# Altium PCB VIrtex_XC7vx690t_2ffg1927i_T_B.PcbDoc (part 2 of 5)
Units mm, origin at the board's own origin, x right, y up, seen from the top; angles counter-clockwise.
Board outline 230 x 148 mm, 12 copper layers (Top Layer 1, GND_IN_Layer, 1_V_IN_layer, 1.2_V_IN_layer, 1.8_V_IN_layer, 3.3_V_IN_layer, IN_Layer 6, IN_Layer 7, IN_Layer 8, IN_Layer 9, IN_Layer 10, Bottom Layer), stack 1.452 mm thick; 73 components, 655 nets, 2765 pads, 42 vias.
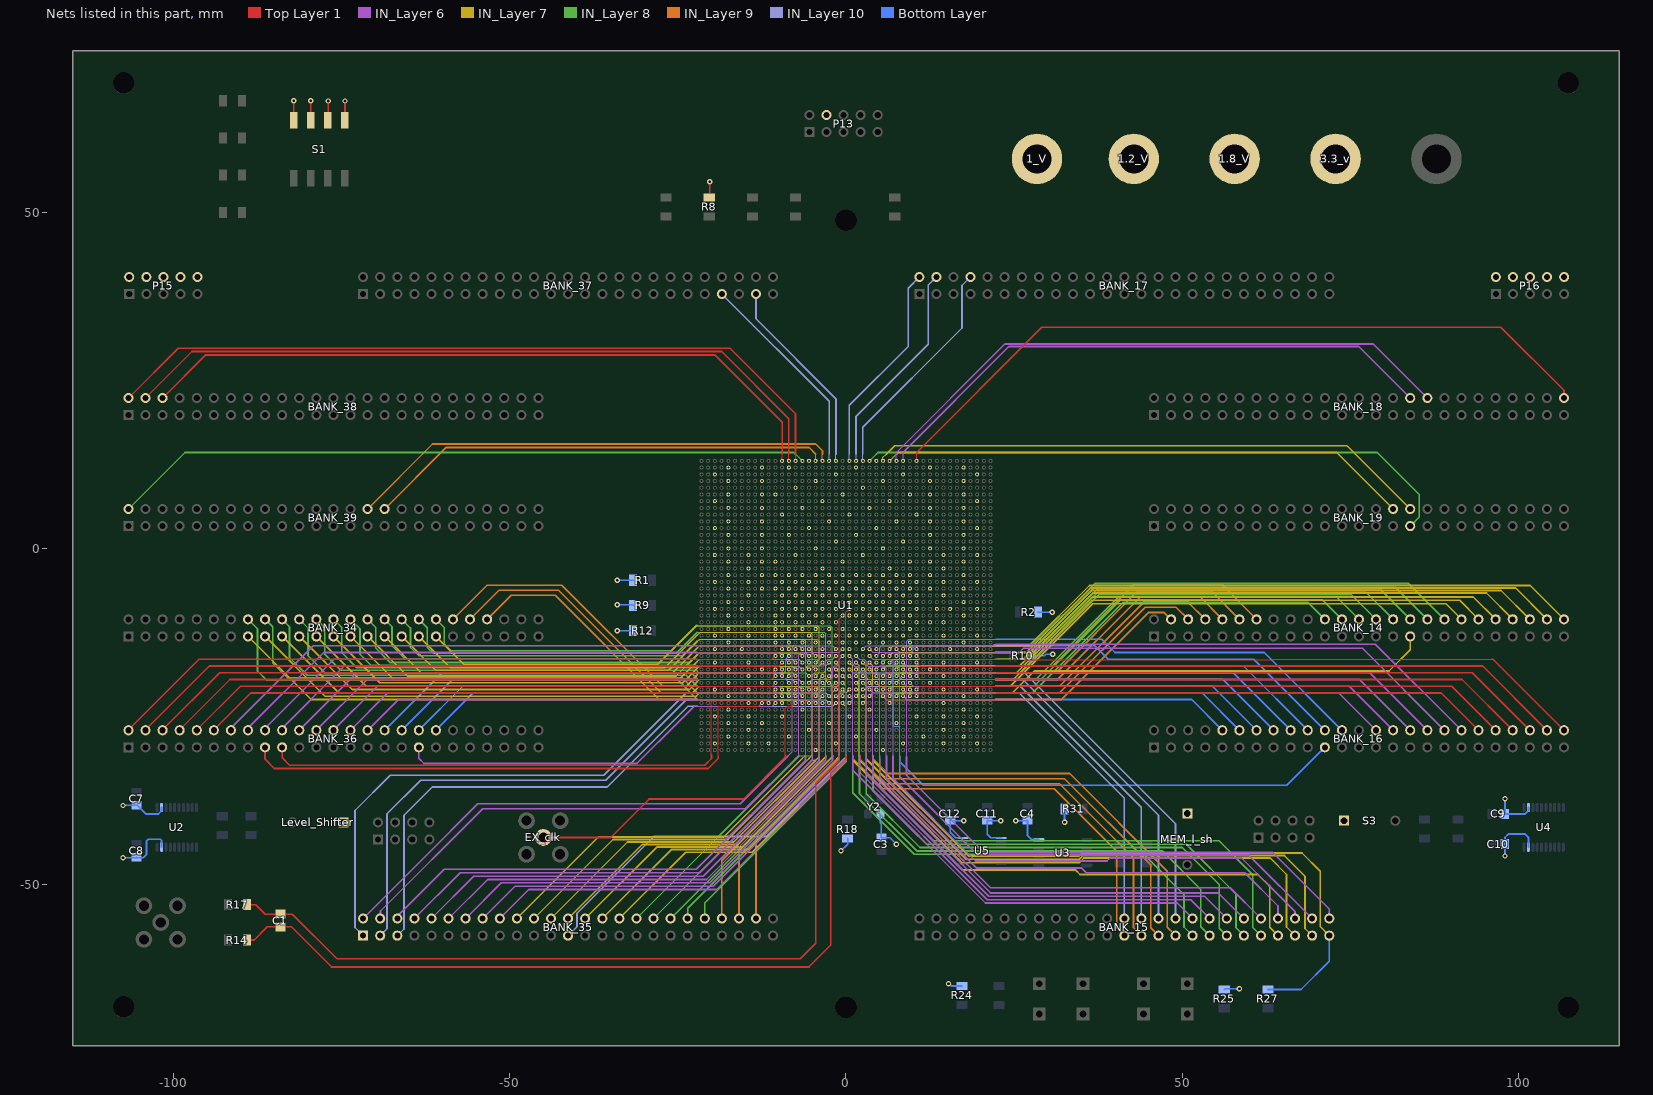
[diagram p12: the nets of this part, all layers, seen from the top]

## Part data
ADC_in EX_clk: "SMB Straight Connector", LatestRevisionDate=17-Jul-2002, LatestRevisionNote="Re-released for DXP Platform.", Publisher="Altium Limited"
BANK_14 BANK_15 BANK_16 BANK_17 BANK_18 BANK_19 BANK_34 BANK_35 BANK_36 BANK_37 BANK_38 BANK_39: "Header, 25-Pin, Dual row", LatestRevisionDate=17-Jul-2002, LatestRevisionNote="Re-released for DXP Platform.", Publisher="Altium Limited"
C1 C3 C4 C7 C8 C9 C10 C11 C12: "Ceramic Chip Capacitor - Standard", PackageDocument=Mar-2001, Code_IPC=2012[0805], Code_JEITA=0805, ComponentLink1Description="Manufacturer Link", ComponentLink1URL=http://www.kemet.com/, ComponentLink2Description=Datasheet, ComponentLink2URL=http://www.kemet.com/kemet/web/homepage/kechome.nsf/vapubfilesname/F3102TA.pdf/$file/F3102TA.pdf, DatasheetDocument=Mar-2001, LatestRevisionDate=19-Mar-2004, LatestRevisionNote="Silkscreen size reduced.", Note="Footprint corresponds to dimensions for bulk cassette packaging. This case size has tightened tolerances.", PackageReference=0805, Published=17-Jul-2002, Publisher="Altium Limited"
Level_Shifter MEM_l_sh S3: "DS1040-01RN, DIP переключатель 1pin  Номенклатурный номер   9000190948", LatestRevisionDate=17-Jul-2002, LatestRevisionNote="Re-released for DXP Platform.", PackageReference=DIP-4, Published=24-Mar-1999, Publisher="Altium Limited"
P13: library part JTAG_CONN_10_5X2, "Header, 5-Pin, Dual row", LatestRevisionDate=17-Jul-2002, LatestRevisionNote="Re-released for DXP Platform.", Publisher="Altium Limited"
P15 P16: "Header, 5-Pin, Dual row", LatestRevisionDate=17-Jul-2002, LatestRevisionNote="Re-released for DXP Platform.", Publisher="Altium Limited"
P17 P18: "Header, 4-Pin, Dual row", LatestRevisionDate=17-Jul-2002, LatestRevisionNote="Re-released for DXP Platform.", Publisher="Altium Limited"
R1 R2 R3 R4 R5 R6 R7 R8 R9 R10 R11 R12 R13 R14 R15 R16 R17 R18 R24 R25 R26 R27 R28 R29 R30 R31 R32 R33: "Resistor", LatestRevisionDate=17-Jul-2002, LatestRevisionNote="Re-released for DXP Platform.", PackageDescription="Axial Device, Thru-Hole; 2 Leads; 0.4 in Pin Spacing", PackageReference=AXIAL-0.4, Published=8-Jun-2000, Publisher="Altium Limited"
S1: "DIP Switch, 4 Position, SPST", Code_IPC=SOIC127P600-8, Code_JEDEC=MS-012-AA, LatestRevisionDate=29-May-2009, LatestRevisionNote="IPC-7351 Footprint Added.", PackageDescription="8-Pin Small Outline Integrated Circuit 1.27 mm Pitch", PackageReference=SO8, PackageVersion=Dec-2002, Published=24-Mar-1999, Publisher="Altium Limited"
SW1 SW2: library part "SWITCH TACTILE", "KLS7-TS6601-4.3-180, Кнопка тактовая h=4.3мм"
U1: "Virtex-7 FPGA, 1000 User I/Os, 1924-Ball BGA, Speed Grade 2, Industrial Grade, Pb-Free", Generic Part Number=XC7VX690T, Manufacturer=Xilinx, Code_JEDEC=MS-034-AAW-1, ComponentLink1Description=Datasheet, ComponentLink1URL=http://www.xilinx.com/support/documentation/data_sheets/ds180_7Series_Overview.pdf, ComponentLink2Description="Package Specification", ComponentLink2URL=http://www.xilinx.com/support/documentation/user_guides/ug475_7Series_Pkg_Pinout.pdf, DatasheetVersion=v1.12, GTX=0, Mounting Technology="Surface Mount", PackageDescription="Flip-Chip BGA, Body 45 x 45 mm, 1.0 mm Pitch", PackageReference=FFG1927, PackageVersion="Rev 1.8", PartNumber=XC7VX690T-2FFG1927I, RoHS=Pb-Free, SelectIO HP=600, Speed Grade=-2
U2 U4: "8-Bit Bidirectional Voltage-Level Shifter with Auto Direction Sensing  Чип и дип Номенклатурный номер / 9000157255 TXB0108PWR, Преобразователь логического уровня"
U3: Manufacturer=Micron, Package="SO8 Narrow", PartNumber=M25P20S-VMN6TPB, Voltage=2.3V-3.6V, Applications=Embedded, ComponentLink1Description="Manufacturer URL", ComponentLink1URL=http://www.micron.com/, ComponentLink2Description=Datasheet, ComponentLink2URL=http://www.micron.com/~/media/Documents/Products/Data%20Sheet/NOR%20Flash/Serial%20NOR/M25P/M25P20.pdf, ComponentLink3Description="Package Specification", ComponentLink3URL=http://www.micron.com/~/media/Documents/Products/Data%20Sheet/NOR%20Flash/Serial%20NOR/M25P/M25P05A.pdf, DatasheetVersion="Rev. 14", Density=2Mb, Mounting Technology="Surface Mount", PackageDescription="8-Pin SO Narrow, 3.9 X 4.9 mm, Pitch 1.27 mm", PackageReference=MICT-MN-8, PackageVersion="Rev 11", Part Family=M25P, Part Status=Production, RoHS=Yes, Speed="75 MHz", Type="Data Storage", Width=x1
U5: "Преобразователь логического уровня, VOLT-LEVEL TRANSLATOR, [TSSOP-14.] Номенклатурный номер / 9000183598"
Y2: library part "SIT8008AI-22- 18", "SIT8008AI-22- 18E-100.000000G"

## Free pads (board coordinates)
  round 3.2 hole 3.2 unplated mask-2539.97: 12(-107.4,-68.2) 12(-107.4,69.2) 12(0,-68.25) 12(0,48.75) 12(107.4,-68.25) 12(107.4,69.2)

## Via types
v1: diameter 0.8, hole 0.4, Top Layer 1 to Bottom Layer, 42 vias

## Nets (pads, with @x,y where several pads share a name; then routed paths per layer and width w, separated by ;. In a path a pad name is that pad's centre, name@x,y a point inside that pad or via, vN(x,y) a via of type N, cw(c..) or ccw(c..) an arc to the next point about the centre after c; other vN are vias at no path point)
1.2V: 1.2_V.1 R1.2 R2.2 U1.AB5 U1.AB40 U1.AC3 U1.AC10 U1.AC36 U1.AC42 U1.AD5 U1.AD23 U1.AD40 U1.AF5 U1.AF40 U1.AG3 U1.AG42 U1.AH5 U1.AH40 U1.AJ3 U1.AJ42 U1.AL3 U1.AL42 U1.AM5 U1.AM40 U1.AP5 U1.AP40 U1.AR3 U1.AR42 U1.AT5 U1.AT40 U1.AV5 U1.AV40 U1.AW3 U1.AW42 U1.AY5 U1.AY40 U1.B5 U1.B40 U1.BB5 U1.BB40 U1.BC3 U1.BC42 U1.C3 U1.C42 U1.D5 U1.D40 U1.F5 U1.F40 U1.G3 U1.G42 U1.H5 U1.H40 U1.K5 U1.K40 U1.L3 U1.L42 U1.M5 U1.M40 U1.P5 U1.P40 U1.R3 U1.R42 U1.T5 U1.T40 U1.V5 U1.V40 U1.W3 U1.W42 U1.Y5 U1.Y40 | length 4.5
  Bottom Layer w0.254: v1(-34,-4.756) -31.656,-4.756 R1.2@-31.65,-4.75 ; R2.2@28.55,-9.5 v1(30.65,-9.5)
1.8V: 1.8_V.1 C3.2 C7.2 C9.2 C12.2 Level_Shifter.1 MEM_l_sh.1 P13.4 P15.6 P15.8 P15.10 P16.6 P16.8 P16.10 R8.1 R9.2 R10.2 R12.2 R18.1 R24.2 R25.2 S1.5 S1.6 S1.7 S1.8 S3.1 U1.A17 U1.A27 U1.AA19 U1.AA27 U1.AB18 U1.AB23 U1.AB26 U1.AC19 U1.AC27 U1.AD18 U1.AD26 U1.AE12 U1.AE19 U1.AE27 U1.AE35 U1.AF18 U1.AF26 U1.AG12 U1.AG19 U1.AG27 U1.AH18 U1.AH26 U1.AJ13 U1.AJ19 U1.AJ23 U1.AJ27 U1.AK20 U1.AK30 U1.AL17 U1.AL27 U1.AM10 U1.AM14 U1.AM24 U1.AM35 U1.AN21 U1.AN31 U1.AP18 U1.AP28 U1.AR15 U1.AR25 U1.AT12 U1.AT22 U1.AT32 U1.AU19 U1.AU29 U1.AV16 U1.AV26 U1.AW13 U1.AW23 U1.AW33 U1.AY10 U1.AY20 U1.AY30 U1.B14 U1.B24 U1.BA17 U1.BA27 U1.BB14 U1.BB24 U1.BB34 U1.BC11 U1.BC21 U1.BC31 U1.BD18 U1.BD28 U1.C21 U1.C31 U1.D18 U1.D28 U1.E15 U1.E25 U1.F12 U1.F22 U1.F32 U1.G19 U1.G29 U1.H16 U1.H26 U1.J13 U1.J23 U1.J33 U1.K20 U1.K30 U1.L17 U1.L27 U1.M14 U1.M24 U1.N21 U1.N31 U1.P10 U1.P18 U1.P28 U1.P35 U1.R15 U1.R25 U1.T10 U1.T12 U1.T22 U1.T32 U1.T35 U1.U19 U1.U29 U1.V10 U1.V16 U1.V18 U1.V26 U1.V35 U1.W19 U1.W27 U1.Y18 U1.Y26 U2.VCCA U4.VCCA U5.VCCB Y2.4 | length 54.3
  Top Layer 1 w0.254: S1.8@-82.1,63.65 v1(-82.1,66.55) ; S1.7@-79.6,63.65 v1(-79.6,66.55) ; S1.6@-77.04,63.65 -77,63.69 v1(-77,66.5) ; S1.5@-74.5,63.65 v1(-74.5,66.5) ; R8.1@-20.333,52.15 -20.25,52.233 v1(-20.25,54.5)
  Bottom Layer w0.254: v1(-107.5,-38.25) -107.45,-38.2 -105.4,-38.2 -104.1,-39.5 -102.232,-39.5 -101.775,-39.043 U2.VCCA@-101.775,-38.55 ; v1(-34,-12.25) R12.2@-31.65,-12.25 ; v1@-33.966,-8.4 -31.716,-8.4 R9.2@-31.616,-8.5 ; v1(-0.75,-45) 0.25,-44 R18.1@0.25,-43.15 ; Y2.4@5.098,-39.5 5.098,-40.848 5.25,-41 C3.2@5.25,-43.05 ; C3.2@5.25,-43.05 6.55,-43.05 v1(7.5,-44) ; v1(15.25,-64.75) 15.398,-64.75 15.748,-65.1 R24.2@17.25,-65.1 ; U5.VCCB@17.4,-43.05 16.3,-43.05 15.5,-42.25 C12.2@15.5,-40.45 15.55,-40.5 v1(17.5,-40.5) ; R10.2@27.65,-16 29.5,-16 29.734,-15.766 30.734,-15.766 v1(30.75,-15.75) ; R25.2@56.25,-65.6 56.35,-65.5 v1(58.5,-65.5) ; v1(98,-37.25) 98,-39.45 C9.2@97.95,-39.5 101.018,-39.5 101.475,-39.043 U4.VCCA@101.475,-38.55
  other v1: -34,-8.4
1V: 1_V.1 U1.AA8 U1.AA13 U1.AA15 U1.AA17 U1.AA21 U1.AA23 U1.AA25 U1.AA29 U1.AA31 U1.AA33 U1.AA37 U1.AB12 U1.AB14 U1.AB16 U1.AB20 U1.AB24 U1.AB28 U1.AB30 U1.AB32 U1.AC7 U1.AC13 U1.AC15 U1.AC17 U1.AC21 U1.AC25 U1.AC29 U1.AC31 U1.AC33 U1.AC38 U1.AD12 U1.AD14 U1.AD16 U1.AD20 U1.AD24 U1.AD28 U1.AD30 U1.AD32 U1.AE8 U1.AE13 U1.AE15 U1.AE17 U1.AE21 U1.AE25 U1.AE29 U1.AE31 U1.AE33 U1.AE37 U1.AF12 U1.AF14 U1.AF16 U1.AF20 U1.AF22 U1.AF24 U1.AF28 U1.AF30 U1.AF32 U1.AG8 U1.AG13 U1.AG15 U1.AG17 U1.AG21 U1.AG23 U1.AG25 U1.AG29 U1.AG31 U1.AG33 U1.AG37 U1.AH12 U1.AH14 U1.AH16 U1.AH20 U1.AH22 U1.AH24 U1.AH28 U1.AH30 U1.AH32 U1.AJ7 U1.AJ15 U1.AJ17 U1.AJ33 U1.AJ38 U1.AL8 U1.AL37 U1.AN8 U1.AN37 U1.AP10 U1.AP35 U1.AR8 U1.AR37 U1.AU8 U1.AU37 U1.AW8 U1.AW37 U1.B10 U1.B35 U1.BA8 U1.BA37 U1.BC8 U1.BC37 U1.D10 U1.D35 U1.F10 U1.F35 U1.H10 U1.H35 U1.K10 U1.K35 U1.M10 U1.M35 U1.R8 U1.R37 U1.U8 U1.U37 U1.V12 U1.V14 U1.V20 U1.V22 U1.V24 U1.V28 U1.V30 U1.V32 U1.W8 U1.W13 U1.W15 U1.W17 U1.W21 U1.W23 U1.W25 U1.W29 U1.W31 U1.W33 U1.W37 U1.Y10 U1.Y12 U1.Y14 U1.Y16 U1.Y20 U1.Y22 U1.Y24 U1.Y28 U1.Y30 U1.Y32 U1.Y35
3.3V: 3.3_v.1 C4.2 C8.2 C10.2 C11.2 P15.2 P15.4 P16.2 P16.4 R31.2 U2.VCCB U3.8 U4.VCCB U5.VCCA | length 31.9
  Bottom Layer w0.254: v1(-107.5,-46) -105.55,-46 C8.2@-105.5,-45.95 -105.45,-46 -104.5,-46 -104,-45.5 -104,-43.5 -103.75,-43.25 -101.924,-43.25 -101.775,-43.399 U2.VCCB@-101.775,-44.45 ; v1(23,-40.5) 21.05,-40.5 C11.2@21,-40.45 21,-42.5 21.55,-43.05 U5.VCCA@23.1,-43.05 23.227,-43.05 U5.VCCA@23.25,-43.027 ; v1(25.25,-40.5) 26.95,-40.5 C4.2@27,-40.45 27,-42.75 27.529,-43.279 28.609,-43.279 U3.8@28.675,-43.345 ; v1(32.5,-40.75) R31.2@32.5,-38.75 ; v1(98,-45.75) 98,-44.05 C10.2@97.95,-44 97.982,-43.968 97.982,-43.018 98.5,-42.5 101,-42.5 101.475,-42.975 U4.VCCB@101.475,-44.45
A13: BANK_38.6 U1.A13 | length 104.7
  Top Layer 1 w0.14: U1.A13@-9.5,13 -9.5,14
  Top Layer 1 w0.254: BANK_38.6@-101.62,22.34 -95.21,28.75 -19.5,28.75 -9.5,18.75 -9.5,14
A14: BANK_38.4 U1.A14 | length 108.9
  Top Layer 1 w0.14: U1.A14@-8.5,13 -8.5,14
  Top Layer 1 w0.254: BANK_38.4@-104.16,22.34 -97.25,29.25 -18.5,29.25 -8.5,19.25 -8.5,14
A15: BANK_38.2 U1.A15 | length 113.3
  Top Layer 1 w0.14: U1.A15@-7.5,13 -7.5,14
  Top Layer 1 w0.254: BANK_38.2@-106.7,22.34 -99.29,29.75 -17.25,29.75 -7.5,20 -7.5,14
A16: BANK_39.2 U1.A16 | length 104.2
  IN_Layer 8 w0.14: -7.5,14 U1.A16@-6.5,13
  IN_Layer 8 w0.254: BANK_39.2@-106.7,5.84 -98.29,14.25 -7.75,14.25 -7.5,14
A18: BANK_39.32 U1.A18 | length 69.3
  IN_Layer 9 w0.14: U1.A18@-4.5,13 -4.5,14
  IN_Layer 9 w0.254: BANK_39.32@-68.6,5.84 -59.44,15 -5.5,15 -4.5,14
A19: BANK_39.30 U1.A19 | length 73.6
  IN_Layer 9 w0.14: U1.A19@-3.5,13 -3.5,14
  IN_Layer 9 w0.254: BANK_39.30@-71.14,5.84 -61.48,15.5 -4.5,15.5 -3.5,14.5 -3.5,14
A20: BANK_37.43 U1.A20 | length 31.4
  IN_Layer 10 w0.14: U1.A20@-2.5,13 -2.5,14
  IN_Layer 10 w0.254: BANK_37.43@-18.46,37.8 -2.5,21.84 -2.5,14
A21: BANK_37.47 U1.A21 | length 29.7
  IN_Layer 10 w0.14: U1.A21@-1.5,13 -1.5,14
  IN_Layer 10 w0.254: BANK_37.47@-13.38,37.8 -13.38,34.13 -1.5,22.25 -1.5,14
A23: BANK_17.2 U1.A23 | length 31.6
  IN_Layer 10 w0.14: U1.A23@0.5,13 0.5,14
  IN_Layer 10 w0.254: 0.5,14 0.5,21.25 9.25,30 9.25,38.69 BANK_17.2@10.9,40.34
A24: BANK_17.4 U1.A24 | length 32.3
  IN_Layer 10 w0.14: U1.A24@1.5,13 1.5,14
  IN_Layer 10 w0.254: 1.5,14 1.5,19.611 12.25,30.361 12.25,39.15 BANK_17.4@13.44,40.34
A25: BANK_17.8 U1.A25 | length 34
  IN_Layer 10 w0.14: U1.A25@2.5,13 2.5,14
  IN_Layer 10 w0.254: 2.5,14 2.5,18 17.25,32.75 17.25,39.07 BANK_17.8@18.52,40.34
A26: BANK_19.31 U1.A26 | length 90.1
  IN_Layer 8 w0.14: U1.A26@3.5,13 4.5,14
  IN_Layer 8 w0.254: 4.5,14 4.75,14.25 79,14.25 85.25,8 85.25,4.65 BANK_19.31@83.9,3.3
A28: BANK_19.32 U1.A28 | length 83.5
  IN_Layer 7 w0.14: U1.A28@5.5,13 5.5,13.5 6,14
  IN_Layer 7 w0.254: 6,14 7.25,15.25 8.25,15.25 74.49,15.25 BANK_19.32@83.9,5.84
A29: BANK_19.30 U1.A29 | length 78.9
  IN_Layer 7 w0.14: U1.A29@6.5,13 7.5,14
  IN_Layer 7 w0.254: 7.5,14 7.75,14.25 72.95,14.25 BANK_19.30@81.36,5.84
A30: BANK_18.34 U1.A30 | length 90.2
  IN_Layer 6 w0.14: U1.A30@7.5,13 7.5,14
  IN_Layer 6 w0.254: 7.5,14 7.5,14.25 23.626,30.376 78.404,30.376 BANK_18.34@86.44,22.34
A31: BANK_18.32 U1.A31 | length 86.4
  IN_Layer 6 w0.14: U1.A31@8.5,13 8.5,14
  IN_Layer 6 w0.254: 8.5,14 8.5,14.279 24.223,30.002 76.238,30.002 BANK_18.32@83.9,22.34
A33: BANK_18.50 U1.A33 | length 110.3
  Top Layer 1 w0.14: U1.A33@10.5,13 10.5,14
  Top Layer 1 w0.254: 10.5,14 10.5,14.25 29.121,32.871 97.379,32.871 106.76,23.49 BANK_18.50@106.76,22.34
ADC_N_in: C1.1 R17.1 U1.AD22 | length 139.3
  Top Layer 1 w0.14: -1.01,-30.9 -1.01,-10.535 -0.5,-10.025 U1.AD22@-0.5,-10
  Top Layer 1 w0.254: R17.1@-89.1,-53 -87.75,-53 -86.35,-54.4 C1.1@-84.1,-54.4 -82.35,-54.4 -75.694,-61.056 -6.806,-61.056 -4.5,-58.75 -4.5,-35 -1.01,-31.51 -1.01,-30.9
ADC_P_in: C1.2 R14.1 U1.AC23 | length 142.8
  Top Layer 1 w0.14: -0.01,-30.9 -0.01,-9.51 U1.AC23@0.5,-9
  Top Layer 1 w0.254: R14.1@-89.1,-58.975 R14.1@-89.1,-58.75 ; R14.1@-89.1,-58.25 -88,-58.25 -86.05,-56.3 C1.2@-84.1,-56.3 -82.45,-56.3 -76.5,-62.25 -5.5,-62.25 -2.25,-59 -2.25,-33.5 -0.01,-31.26 -0.01,-30.9
AJ14: BANK_36.14 U1.AJ14 | length 88.7
  IN_Layer 6 w0.14: -22.1,-14.5 -9,-14.5 U1.AJ14@-8.5,-15
  IN_Layer 6 w0.254: BANK_36.14@-91.77,-27.06 -79.21,-14.5 -22.1,-14.5
AJ16: BANK_34.31 U1.AJ16 | length 66.2
  IN_Layer 7 w0.14: -22.1,-14.826 -21.784,-14.51 -6.99,-14.51 U1.AJ16@-6.5,-15
  IN_Layer 7 w0.254: BANK_34.31@-68.6,-13.1 -63.2,-18.5 -25.774,-18.5 -22.1,-14.826
AJ21: BANK_35.2 U1.AJ21 | length 96.3
  IN_Layer 6 w0.14: -8.65,-30.9 -8.01,-30.26 -8.01,-14.817 -7.703,-14.51 -1.99,-14.51 U1.AJ21@-1.5,-15
  IN_Layer 6 w0.254: BANK_35.2@-71.8,-55.06 -62.868,-46.128 -54.74,-38 -15.75,-38 -8.65,-30.9
AJ22: BANK_35.4 U1.AJ22 | length 94.7
  IN_Layer 6 w0.14: -7.5,-31.25 -7.01,-30.76 -7.01,-15.817 -6.683,-15.49 -0.99,-15.49 U1.AJ22@-0.5,-15
  IN_Layer 6 w0.254: BANK_35.4@-69.26,-55.06 -69.218,-55.018 -69.218,-53.929 -54.039,-38.75 -15,-38.75 -7.5,-31.25
AJ25: BANK_15.50 U1.AJ25 | length 98.3
  IN_Layer 6 w0.14: U1.AJ25@2.5,-15 2.99,-14.51 8.703,-14.51 9,-14.807 9,-31
  IN_Layer 6 w0.254: 9,-31 9,-33.75 20.497,-45.247 63.467,-45.247 71.86,-53.64 BANK_15.50@71.86,-55.06
AJ26: BANK_15.48 U1.AJ26 | length 93.1
  IN_Layer 6 w0.14: U1.AJ26@3.5,-15 3.99,-15.49 7.683,-15.49 8,-15.807 8,-31
  IN_Layer 6 w0.254: 8,-31 8,-34 19.621,-45.621 59.881,-45.621 BANK_15.48@69.32,-55.06
AJ29: BANK_14.50 U1.AJ29 | length 106.3
  IN_Layer 7 w0.14: U1.AJ29@6.5,-15 7.01,-14.49 22.3,-14.49
  IN_Layer 7 w0.254: 22.3,-14.49 27.26,-14.49 36.215,-5.535 101.735,-5.535 BANK_14.50@106.76,-10.56
AJ30: BANK_16.16 U1.AJ30 | length 63.2
  Bottom Layer w0.14: U1.AJ30@7.5,-15 7.99,-15.49 7.99,-19.183 8.297,-19.49 22.3,-19.49
  Bottom Layer w0.254: 22.3,-19.49 56.01,-19.49 BANK_16.16@63.58,-27.06
AJ31: BANK_16.24 U1.AJ31 | length 71.9
  Bottom Layer w0.14: U1.AJ31@8.5,-15 9,-14.5 9,-13.807 9.297,-13.51 22.3,-13.51
  Bottom Layer w0.254: 22.3,-13.51 38.01,-13.51 40,-15.5 62.18,-15.5 BANK_16.24@73.74,-27.06
AJ32: BANK_16.38 U1.AJ32 | length 87.6
  IN_Layer 6 w0.14: U1.AJ32@9.5,-15 9.99,-14.51 21.764,-14.51 22.024,-14.25 22.3,-14.25
  IN_Layer 6 w0.254: 22.3,-14.25 78.71,-14.25 BANK_16.38@91.52,-27.06
AK12: BANK_36.2 U1.AK12 | length 100.8
  Top Layer 1 w0.14: -22.3,-16.51 -11.01,-16.51 U1.AK12@-10.5,-16
  Top Layer 1 w0.254: BANK_36.2@-106.73,-27.03 -96.21,-16.51 -22.3,-16.51
AK13: BANK_36.16 U1.AK13 | length 84.7
  IN_Layer 6 w0.14: -22.1,-15.5 -10,-15.5 U1.AK13@-9.5,-16
  IN_Layer 6 w0.254: BANK_36.16@-89.23,-27.06 -77.67,-15.5 -22.1,-15.5
AK14: BANK_36.32 U1.AK14 | length 65.7
  Bottom Layer w0.14: -22.1,-18.49 -9.297,-18.49 -8.995,-18.188 -8.995,-16.495 U1.AK14@-8.5,-16
  Bottom Layer w0.254: BANK_36.32@-68.6,-27.06 -60.03,-18.49 -22.1,-18.49
AK16: BANK_34.29 U1.AK16 | length 68.7
  IN_Layer 7 w0.14: -22.1,-15.826 -21.784,-15.51 -6.99,-15.51 U1.AK16@-6.5,-16
  IN_Layer 7 w0.254: BANK_34.29@-71.14,-13.1 -65.24,-19 -25.274,-19 -22.1,-15.826
AK17: BANK_34.33 U1.AK17 | length 66.6
  IN_Layer 7 w0.14: -22.1,-13.85 -21.76,-13.51 -6.297,-13.51 -5.99,-13.817 -5.99,-15.51 U1.AK17@-5.5,-16
  IN_Layer 7 w0.254: BANK_34.33@-66.06,-13.1 -61.034,-18.126 -26.376,-18.126 -22.1,-13.85
AK18: BANK_34.35 U1.AK18 | length 66.1
  IN_Layer 7 w0.14: -22.1,-12.907 -21.703,-12.51 -5.297,-12.51 -4.99,-12.817 -4.99,-15.51 U1.AK18@-4.5,-16
  IN_Layer 7 w0.254: BANK_34.35@-63.52,-13.1 -58.87,-17.75 -26.943,-17.75 -22.1,-12.907
AK19: BANK_35.6 U1.AK19 | length 88.2
  IN_Layer 6 w0.14: -6.01,-30.9 -6.01,-16.817 -5.683,-16.49 -3.99,-16.49 U1.AK19@-3.5,-16
  IN_Layer 6 w0.254: BANK_35.6@-66.72,-55.06 -66.72,-54.723 -66.344,-54.347 -66.344,-54.344 -59.75,-47.75 -22.25,-47.75 -6.01,-31.51 -6.01,-30.9
AK21: BANK_35.8 U1.AK21 | length 87.1
  IN_Layer 6 w0.14: -5.01,-30.9 -5.01,-17.817 -4.683,-17.49 -3.297,-17.49 -2.99,-17.183 -2.99,-16.797 -2.683,-16.49 -1.99,-16.49 U1.AK21@-1.5,-16
  IN_Layer 6 w0.254: BANK_35.8@-64.18,-55.06 -57.37,-48.25 -21.75,-48.25 -5.01,-31.51 -5.01,-30.9
AK22: BANK_35.10 U1.AK22 | length 85.4
  IN_Layer 6 w0.14: -4,-31 -3.99,-30.99 -3.99,-30.9 -3.99,-19.797 -3.688,-19.495 -2.302,-19.495 -2,-19.193 -2,-17.807 -1.683,-17.49 -1.297,-17.49 -0.99,-17.183 -0.99,-16.49 U1.AK22@-0.5,-16
  IN_Layer 6 w0.254: BANK_35.10@-61.64,-55.06 -55.33,-48.75 -21.25,-48.75 -4,-31.5 -4,-31
AK23: BANK_15.42 U1.AK23 | length 86.9
  IN_Layer 6 w0.14: U1.AK23@0.5,-16 0.99,-16.49 0.99,-17.183 1.316,-17.509 1.702,-17.509 2.01,-17.817 2.01,-18.203 2.317,-18.51 4.703,-18.51 5.01,-18.817 5.01,-30.9
  IN_Layer 6 w0.254: 5.01,-30.9 5.01,-34.03 21.48,-50.5 57.14,-50.5 BANK_15.42@61.7,-55.06
AK24: BANK_15.44 U1.AK24 | length 89.8
  IN_Layer 6 w0.14: U1.AK24@1.5,-16 1.99,-16.49 2.683,-16.49 3.01,-16.817 3.01,-17.203 3.317,-17.51 5.703,-17.51 6.01,-17.817 6.01,-30.9
  IN_Layer 6 w0.254: 6.01,-30.9 6.01,-34.179 19.361,-47.531 34.999,-47.531 35.718,-48.25 59.289,-48.25 64.24,-53.201 BANK_15.44@64.24,-55.06
AK26: BANK_15.46 U1.AK26 | length 90.6
  IN_Layer 6 w0.14: U1.AK26@3.5,-16 3.99,-16.49 6.683,-16.49 7,-16.807 7,-30.9
  IN_Layer 6 w0.254: 7,-30.9 7,-34.25 19.25,-46.5 38.813,-46.5 39.25,-46.063 58.813,-46.063 66.78,-54.03 BANK_15.46@66.78,-55.06
AK27: BANK_14.36 U1.AK27 | length 91.7
  Top Layer 1 w0.14: U1.AK27@4.5,-16 U1.AK27@4.6,-16
  IN_Layer 8 w0.14: U1.AK27@4.5,-16 4.99,-15.51 4.99,-14.76 5.25,-14.5 22.3,-14.5
  IN_Layer 8 w0.254: 22.3,-14.5 27.721,-14.5 36.971,-5.25 83.67,-5.25 BANK_14.36@88.98,-10.56
AK28: BANK_14.34 U1.AK28 | length 87.1
  IN_Layer 8 w0.14: U1.AK28@5.5,-16 5.99,-15.51 22.3,-15.51
  IN_Layer 8 w0.254: 22.3,-15.51 27.24,-15.51 36.965,-5.785 81.665,-5.785 BANK_14.34@86.44,-10.56
AK29: BANK_14.48 U1.AK29 | length 103.8
  IN_Layer 7 w0.14: U1.AK29@6.5,-16 7.01,-15.49 22.3,-15.49
  IN_Layer 7 w0.254: 22.3,-15.49 26.789,-15.49 36.37,-5.909 99.569,-5.909 BANK_14.48@104.22,-10.56
AK31: BANK_16.22 U1.AK31 | length 68.7
  Bottom Layer w0.14: U1.AK31@8.5,-16 9.01,-15.49 9.703,-15.49 10,-15.193 10,-14.807 10.297,-14.51 22.3,-14.51
  Bottom Layer w0.254: 22.3,-14.51 37.01,-14.51 39,-16.5 60.64,-16.5 BANK_16.22@71.2,-27.06
AK32: BANK_16.36 U1.AK32 | length 85
  IN_Layer 6 w0.14: U1.AK32@9.5,-16 9.99,-15.51 22.3,-15.51
  IN_Layer 6 w0.254: 22.3,-15.51 25.762,-15.51 26.323,-14.948 26.398,-14.874 30.749,-14.868 cw(c30.75,-15.75) 30.75,-14.868 76.794,-14.874 76.868,-14.948 BANK_16.36@88.98,-27.06
AK33: BANK_16.50 U1.AK33 | length 100.8
  Top Layer 1 w0.14: U1.AK33@10.5,-16 11.01,-16.51 22.3,-16.51
  Top Layer 1 w0.254: 22.3,-16.51 22.51,-16.51 30.737,-16.632 ccw(c30.75,-15.75) 30.752,-16.632 96,-16.51 96.21,-16.51 96.284,-16.584 BANK_16.50@106.76,-27.06
AL13: BANK_36.4 U1.AL13 | length 98.8
  Top Layer 1 w0.14: -22.3,-17.51 -10.01,-17.51 U1.AL13@-9.5,-17
  Top Layer 1 w0.254: BANK_36.4@-104.19,-27.03 -94.67,-17.51 -22.3,-17.51
AL14: BANK_36.18 U1.AL14 | length 82.8
  IN_Layer 6 w0.14: -22.1,-16.5 -9,-16.5 U1.AL14@-8.5,-17
  IN_Layer 6 w0.254: BANK_36.18@-86.69,-27.06 -76.13,-16.5 -22.1,-16.5
AL15: BANK_34.27 U1.AL15 | length 70.3
  IN_Layer 7 w0.14: -22.1,-16.826 -21.784,-16.51 -7.99,-16.51 U1.AL15@-7.5,-17
  IN_Layer 7 w0.254: BANK_34.27@-73.68,-13.1 -67.28,-19.5 -24.774,-19.5 -22.1,-16.826
AL16: BANK_34.28 U1.AL16 | length 72.8
  IN_Layer 8 w0.14: -22.1,-16.826 -21.784,-16.51 -6.99,-16.51 U1.AL16@-6.5,-17
  IN_Layer 8 w0.254: BANK_34.28@-73.68,-10.56 -72.262,-11.978 -72.262,-14.174 -72.262,-15.738 -70.626,-17.374 -22.648,-17.374 -22.1,-16.826
AL18: BANK_34.37 U1.AL18 | length 66.6
  IN_Layer 7 w0.14: -22.1,-11.5 -4.307,-11.5 -3.99,-11.817 -3.99,-16.49 U1.AL18@-4.5,-17
  IN_Layer 7 w0.254: BANK_34.37@-60.98,-13.1 -56.83,-17.25 -28,-17.25 -22.25,-11.5 -22.1,-11.5
AL19: BANK_35.20 U1.AL19 | length 68.8
  IN_Layer 7 w0.14: -6.5,-31.25 -6.01,-30.76 -6.01,-17.817 -5.683,-17.49 -3.99,-17.49 U1.AL19@-3.5,-17
  IN_Layer 7 w0.254: BANK_35.20@-48.94,-55.06 -36.816,-42.936 -18.186,-42.936 -6.5,-31.25
AL20: BANK_35.22 U1.AL20 | length 67.1
  IN_Layer 7 w0.14: -5.5,-31.25 -5.01,-30.76 -5.01,-18.817 -4.683,-18.49 -3.297,-18.49 -2.99,-18.183 -2.99,-17.49 U1.AL20@-2.5,-17
  IN_Layer 7 w0.254: BANK_35.22@-46.4,-55.06 -34.65,-43.31 -17.56,-43.31 -5.5,-31.25
AL21: BANK_35.28 U1.AL21 | length 61.6
  IN_Layer 7 w0.14: -2.01,-30.9 -2.01,-20.817 -1.703,-20.51 -1.317,-20.51 -1.01,-20.203 -1.01,-17.49 U1.AL21@-1.5,-17
  IN_Layer 7 w0.254: BANK_35.28@-38.78,-55.06 -28.152,-44.432 -15.432,-44.432 -2.01,-31.01 -2.01,-30.9
AL23: BANK_15.43 U1.AL23 | length 92.3
  IN_Layer 7 w0.14: U1.AL23@0.5,-17 1,-17.5 1,-31.5
  IN_Layer 7 w0.254: 1,-31.5 17.353,-47.853 34.156,-47.853 34.803,-48.5 61.25,-48.5 63,-50.25 63,-56.36 BANK_15.43@64.24,-57.6
AL24: BANK_15.45 U1.AL24 | length 95.4
  IN_Layer 7 w0.14: U1.AL24@1.5,-17 2,-17.5 2,-31.5
  IN_Layer 7 w0.254: 2,-31.5 17.25,-46.75 34.702,-46.75 35.389,-46.063 63.063,-46.063 65.5,-48.5 65.5,-56.32 BANK_15.45@66.78,-57.6
AL25: BANK_15.47 U1.AL25 | length 96.8
  IN_Layer 7 w0.14: U1.AL25@2.5,-17 3,-17.5 3,-31.387
  IN_Layer 7 w0.254: 3,-31.387 17.863,-46.25 34.673,-46.25 35.234,-45.689 65.189,-45.689 68.25,-48.75 68.25,-56.53 BANK_15.47@69.32,-57.6
AL26: BANK_15.49 R27.2 U1.AL26 | length 113.2
  IN_Layer 7 w0.14: U1.AL26@3.5,-17 4,-17.5 4,-31.5
  IN_Layer 7 w0.254: 4,-31.5 18.25,-45.75 34.644,-45.75 35.079,-45.315 67.815,-45.315 70.5,-48 70.5,-56.24 BANK_15.49@71.86,-57.6
  Bottom Layer w0.254: R27.2@62.75,-65.6 67.65,-65.6 71.86,-61.39 BANK_15.49@71.86,-57.6
AL28: BANK_14.32 U1.AL28 | length 84.7
  IN_Layer 8 w0.14: U1.AL28@5.5,-17 5.99,-16.51 22.3,-16.51
  IN_Layer 8 w0.254: 22.3,-16.51 26.932,-16.51 37.283,-6.159 79.499,-6.159 BANK_14.32@83.9,-10.56
AL29: BANK_14.46 U1.AL29 | length 101.4
  IN_Layer 7 w0.14: U1.AL29@6.5,-17 7.01,-16.49 22.3,-16.49
  IN_Layer 7 w0.254: 22.3,-16.49 26.318,-16.49 36.524,-6.283 97.403,-6.283 BANK_14.46@101.68,-10.56
AL30: BANK_16.21 U1.AL30 | length 82.9
  Bottom Layer w0.14: U1.AL30@7.5,-17 7,-17.5 7,-26.408 7.082,-26.49 7.925,-26.49 8.008,-26.572 8.008,-30.9
  Bottom Layer w0.254: 8.008,-30.9 8.008,-31.758 11.5,-35.25 65.55,-35.25 BANK_16.21@71.2,-29.6
AL31: BANK_16.20 U1.AL31 | length 64.3
  Bottom Layer w0.14: U1.AL31@8.5,-17 9.01,-17.51 22.3,-17.51
  Bottom Layer w0.254: 22.3,-17.51 59.11,-17.51 BANK_16.20@68.66,-27.06
AL33: BANK_16.48 U1.AL33 | length 97.9
  Top Layer 1 w0.14: U1.AL33@10.5,-17 11.01,-17.51 22.3,-17.51
  Top Layer 1 w0.254: 22.3,-17.51 94.67,-17.51 BANK_16.48@104.22,-27.06
AM12: BANK_36.6 U1.AM12 | length 94.9
  Top Layer 1 w0.14: -22.3,-18.49 -10.99,-18.49 U1.AM12@-10.5,-18
  Top Layer 1 w0.254: BANK_36.6@-101.65,-27.03 -93.11,-18.49 -22.3,-18.49
AM13: BANK_36.20 U1.AM13 | length 78.8
  IN_Layer 6 w0.14: -22.1,-17.5 -10,-17.5 U1.AM13@-9.5,-18
  IN_Layer 6 w0.254: BANK_36.20@-84.15,-27.06 -74.59,-17.5 -22.1,-17.5
AM15: BANK_34.25 U1.AM15 | length 72.8
  IN_Layer 7 w0.14: -22.1,-17.826 -21.784,-17.51 -7.99,-17.51 U1.AM15@-7.5,-18
  IN_Layer 7 w0.254: BANK_34.25@-76.22,-13.1 -69.32,-20 -24.274,-20 -22.1,-17.826
AM16: BANK_34.26 U1.AM16 | length 75.2
  IN_Layer 8 w0.14: -22.1,-17.75 -22.024,-17.75 -21.784,-17.51 -6.99,-17.51 U1.AM16@-6.5,-18
  IN_Layer 8 w0.254: BANK_34.26@-76.22,-10.56 -75,-11.78 -75,-15.5 -72.75,-17.75 -22.1,-17.75
AM17: BANK_34.30 U1.AM17 | length 72.7
  IN_Layer 8 w0.14: -22.1,-15.826 -21.784,-15.51 -6.297,-15.51 -5.99,-15.817 -5.99,-17.51 U1.AM17@-5.5,-18
  IN_Layer 8 w0.254: BANK_34.30@-71.14,-10.56 -69.926,-11.774 -69.926,-14.824 -67.75,-17 -23.274,-17 -22.1,-15.826
AM18: BANK_34.32 U1.AM18 | length 72.1
  IN_Layer 8 w0.14: -22.1,-14.826 -21.784,-14.51 -5.297,-14.51 -4.99,-14.817 -4.99,-17.51 U1.AM18@-4.5,-18
  IN_Layer 8 w0.254: BANK_34.32@-68.6,-10.56 -67.5,-11.66 -67.5,-14.5 -65.5,-16.5 -23.774,-16.5 -22.1,-14.826
AM20: BANK_35.26 U1.AM20 | length 62.1
  IN_Layer 7 w0.14: -3.5,-31.5 -3.01,-31.01 -3.01,-19.817 -2.693,-19.5 -2.307,-19.5 -2.01,-19.203 -2.01,-18.49 U1.AM20@-2.5,-18
  IN_Layer 7 w0.254: BANK_35.26@-41.32,-55.06 -30.318,-44.058 -16.058,-44.058 -3.5,-31.5
AM21: BANK_35.16 U1.AM21 | length 76.5
  IN_Layer 6 w0.14: U1.AM21@-1.5,-18 -1,-18.5 -1,-30.9
  IN_Layer 6 w0.254: BANK_35.16@-54.02,-55.06 -49.21,-50.25 -19.75,-50.25 -1,-31.5 -1,-30.9
AM22: BANK_35.18 U1.AM22 | length 74.9
  IN_Layer 6 w0.14: U1.AM22@-0.5,-18 -0.01,-18.49 -0.01,-31.01
  IN_Layer 6 w0.254: BANK_35.18@-51.48,-55.06 -47.17,-50.75 -19.25,-50.75 -0.01,-31.51 -0.01,-31.01
AM23: BANK_15.34 U1.AM23 | length 74.9
  IN_Layer 6 w0.14: U1.AM23@0.5,-18 1.01,-18.51 1.01,-30.9
  IN_Layer 6 w0.254: 1.01,-30.9 1.01,-33.01 20.75,-52.75 49.23,-52.75 BANK_15.34@51.54,-55.06
AM25: BANK_15.39 U1.AM25 | length 85.9
  IN_Layer 8 w0.14: U1.AM25@2.5,-18 2.99,-18.49 2.99,-19.183 3.302,-19.495 3.688,-19.495 4,-19.807 4,-31.5
  IN_Layer 8 w0.254: 4,-31.5 4,-36 12,-44 50.591,-44 58,-51.409 58,-56.44 BANK_15.39@59.16,-57.6
AM26: BANK_15.41 U1.AM26 | length 89
  IN_Layer 8 w0.14: U1.AM26@3.5,-18 3.99,-18.49 4.683,-18.49 5,-18.807 5,-31.447
  IN_Layer 8 w0.254: 5,-31.447 5,-35.5 13,-43.5 55.47,-43.5 60.5,-48.53 60.5,-56.4 BANK_15.41@61.7,-57.6
AM27: BANK_14.14 U1.AM27 | length 63.8
  IN_Layer 9 w0.14: U1.AM27@4.5,-18 5.01,-17.49 22.3,-17.49
  IN_Layer 9 w0.254: 22.3,-17.49 30.76,-17.49 42.73,-5.52 56,-5.52 BANK_14.14@61.04,-10.56
AM28: BANK_14.30 U1.AM28 | length 82.3
  IN_Layer 8 w0.14: U1.AM28@5.5,-18 6,-17.5 22.3,-17.5
  IN_Layer 8 w0.254: 22.3,-17.5 26.471,-17.5 37.438,-6.533 77.333,-6.533 BANK_14.30@81.36,-10.56
AM30: BANK_14.44 U1.AM30 | length 98
  IN_Layer 7 w0.14: U1.AM30@7.5,-18 8.01,-17.49 22.3,-17.49
  IN_Layer 7 w0.254: 22.3,-17.49 25.847,-17.49 36.679,-6.657 95.237,-6.657 BANK_14.44@99.14,-10.56
AM31: BANK_16.18 U1.AM31 | length 61.4
  Bottom Layer w0.14: U1.AM31@8.5,-18 8.52,-18 9.02,-18.5 22.3,-18.5
  Bottom Layer w0.254: 22.3,-18.5 57.56,-18.5 BANK_16.18@66.12,-27.06
AM32: BANK_16.34 U1.AM32 | length 80.7
  IN_Layer 6 w0.14: U1.AM32@9.5,-18 10,-18.5 22.3,-18.5
  IN_Layer 6 w0.254: 22.3,-18.5 77.88,-18.5 BANK_16.34@86.44,-27.06
AM33: BANK_16.46 U1.AM33 | length 94.9
  Top Layer 1 w0.14: U1.AM33@10.5,-18 10.99,-18.49 22.3,-18.49
  Top Layer 1 w0.254: 22.3,-18.49 93.11,-18.49 BANK_16.46@101.68,-27.06
AN12: BANK_36.8 U1.AN12 | length 91.9
  Top Layer 1 w0.14: -22.3,-19.51 -11.01,-19.51 U1.AN12@-10.5,-19
  Top Layer 1 w0.254: BANK_36.8@-99.11,-27.03 -91.59,-19.51 -22.3,-19.51
AN13: BANK_36.22 U1.AN13 | length 75.5
  IN_Layer 6 w0.14: -22.1,-18.51 -9.99,-18.51 U1.AN13@-9.5,-19
  IN_Layer 6 w0.254: BANK_36.22@-81.3,-27.06 -72.75,-18.51 -22.1,-18.51
AN14: BANK_36.34 U1.AN14 | length 60.9
  Bottom Layer w0.14: -22.1,-19.5 -9,-19.5 U1.AN14@-8.5,-19
  Bottom Layer w0.254: BANK_36.34@-66.06,-27.06 -58.5,-19.5 -22.1,-19.5
AN15: BANK_34.23 U1.AN15 | length 75.4
  IN_Layer 7 w0.14: -22.1,-18.826 -21.784,-18.51 -7.99,-18.51 U1.AN15@-7.5,-19
  IN_Layer 7 w0.254: BANK_34.23@-78.76,-13.1 -71.36,-20.5 -23.774,-20.5 -22.1,-18.826
AN17: BANK_34.24 U1.AN17 | length 79.1
  IN_Layer 8 w0.14: -22.1,-18.254 -21.854,-18.5 -6,-18.5 U1.AN17@-5.5,-19
  IN_Layer 8 w0.254: BANK_34.24@-78.76,-10.56 -77.5,-11.82 -77.5,-15.75 -75.126,-18.124 -22.23,-18.124 -22.1,-18.254
AN18: BANK_34.34 U1.AN18 | length 72.5
  IN_Layer 8 w0.14: -22.1,-13.826 -21.784,-13.51 -4.297,-13.51 -4.01,-13.797 -4.01,-18.51 U1.AN18@-4.5,-19
  IN_Layer 8 w0.254: BANK_34.34@-66.06,-10.56 -64.75,-11.87 -64.75,-14.75 -63.5,-16 -24.274,-16 -22.1,-13.826
AN19: BANK_35.24 U1.AN19 | length 62
  IN_Layer 7 w0.14: -4.5,-31.5 -4.01,-31.01 -4.01,-19.51 U1.AN19@-3.5,-19
  IN_Layer 7 w0.254: BANK_35.24@-43.86,-55.06 -32.484,-43.684 -16.684,-43.684 -4.5,-31.5
AN20: BANK_35.44 U1.AN20 | length 42.7
  IN_Layer 9 w0.14: -3.01,-30.9 -3.01,-19.51 U1.AN20@-2.5,-19
  IN_Layer 9 w0.254: BANK_35.44@-18.46,-55.06 -18.46,-46.46 -3.01,-31.01 -3.01,-30.9
AN22: BANK_35.30 U1.AN22 | length 58.2
  IN_Layer 7 w0.14: -1.01,-31.255 -1.01,-21.817 -0.693,-21.5 -0.307,-21.5 -0.01,-21.203 -0.01,-19.49 U1.AN22@-0.5,-19
  IN_Layer 7 w0.254: BANK_35.30@-36.24,-55.06 -25.986,-44.806 -14.556,-44.806 -1.01,-31.26 -1.01,-31.255
AN23: BANK_15.33 U1.AN23 | length 79.7
  IN_Layer 8 w0.14: U1.AN23@0.5,-19 1,-19.5 1,-31.5
  IN_Layer 8 w0.254: 1,-31.5 1,-36.335 10.165,-45.5 44.25,-45.5 50.25,-51.5 50.25,-56.31 BANK_15.33@51.54,-57.6
AN24: BANK_15.36 U1.AN24 | length 75.6
  IN_Layer 6 w0.14: U1.AN24@1.5,-19 2.01,-19.51 2.01,-30.9
  IN_Layer 6 w0.254: 2.01,-30.9 2.01,-33.26 21,-52.25 51.27,-52.25 BANK_15.36@54.08,-55.06
AN25: BANK_15.38 U1.AN25 | length 77.3
  IN_Layer 6 w0.14: U1.AN25@2.5,-19 3.01,-19.51 3.01,-30.9
  IN_Layer 6 w0.254: 3.01,-30.9 3.01,-33.51 21.25,-51.75 53.31,-51.75 BANK_15.38@56.62,-55.06
AN27: BANK_14.10 U1.AN27 | length 58.1
  IN_Layer 9 w0.14: U1.AN27@4.5,-19 5,-19.5 22.3,-19.5
  IN_Layer 9 w0.254: 22.3,-19.5 31.5,-19.5 43.75,-7.25 52.65,-7.25 BANK_14.10@55.96,-10.56
AN28: BANK_14.12 U1.AN28 | length 59.9
  IN_Layer 9 w0.14: U1.AN28@5.5,-19 6.01,-18.49 22.3,-18.49
  IN_Layer 9 w0.254: 22.3,-18.49 31.26,-18.49 43.25,-6.5 54.44,-6.5 BANK_14.12@58.5,-10.56
AN29: BANK_14.28 U1.AN29 | length 78.8
  IN_Layer 8 w0.14: U1.AN29@6.5,-19 7.01,-18.49 22.3,-18.49
  IN_Layer 8 w0.254: 22.3,-18.49 26.01,-18.49 37.593,-6.907 75.167,-6.907 BANK_14.28@78.82,-10.56
AN30: BANK_14.42 U1.AN30 | length 95.3
  IN_Layer 7 w0.14: U1.AN30@7.5,-19 7.99,-18.51 22.3,-18.51
  IN_Layer 7 w0.254: 22.3,-18.51 25.356,-18.51 36.616,-7.25 93.29,-7.25 BANK_14.42@96.6,-10.56
AN32: BANK_16.32 U1.AN32 | length 77.7
  IN_Layer 6 w0.14: U1.AN32@9.5,-19 10,-19.5 22.3,-19.5
  IN_Layer 6 w0.254: 22.3,-19.5 76.34,-19.5 BANK_16.32@83.9,-27.06
AN33: BANK_16.44 U1.AN33 | length 92
  Top Layer 1 w0.14: U1.AN33@10.5,-19 11.01,-19.51 22.3,-19.51
  Top Layer 1 w0.254: 22.3,-19.51 91.59,-19.51 BANK_16.44@99.14,-27.06
AP12: BANK_36.10 U1.AP12 | length 89
  Top Layer 1 w0.14: -22.1,-20.5 -11,-20.5 U1.AP12@-10.5,-20
  Top Layer 1 w0.254: BANK_36.10@-96.57,-27.03 -90.04,-20.5 -22.1,-20.5
AP14: BANK_36.24 U1.AP14 | length 73.6
  IN_Layer 6 w0.14: -22.1,-19.51 -8.99,-19.51 U1.AP14@-8.5,-20
  IN_Layer 6 w0.254: BANK_36.24@-78.76,-27.06 -71.21,-19.51 -22.1,-19.51
AP15: BANK_34.21 U1.AP15 | length 77.9
  IN_Layer 7 w0.14: -22.1,-19.826 -21.784,-19.51 -7.99,-19.51 U1.AP15@-7.5,-20
  IN_Layer 7 w0.254: BANK_34.21@-81.3,-13.1 -73.4,-21 -23.274,-21 -22.1,-19.826
AP16: BANK_34.22 U1.AP16 | length 81.1
  IN_Layer 8 w0.14: -22.1,-19.4 -21.99,-19.51 -6.99,-19.51 U1.AP16@-6.5,-20
  IN_Layer 8 w0.254: BANK_34.22@-81.3,-10.56 -80,-11.86 -80,-16 -77.502,-18.498 -23.002,-18.498 -22.1,-19.4
AP17: BANK_34.36 U1.AP17 | length 75
  IN_Layer 8 w0.14: -22.1,-12.49 -3.26,-12.49 -3.01,-12.74 -3.01,-19.26 -3.26,-19.51 -5.01,-19.51 U1.AP17@-5.5,-20
  IN_Layer 8 w0.254: BANK_34.36@-63.52,-10.56 -62.25,-11.83 -62.25,-14.75 -61.374,-15.626 -25.236,-15.626 -22.1,-12.49
AP19: BANK_35.12 U1.AP19 | length 77.6
  IN_Layer 6 w0.14: U1.AP19@-3.5,-20 -3,-20.5 -3,-30.9
  IN_Layer 6 w0.254: BANK_35.12@-59.1,-55.06 -53.29,-49.25 -20.75,-49.25 -3,-31.5 -3,-30.9
AP20: BANK_35.46 U1.AP20 | length 41
  IN_Layer 9 w0.14: U1.AP20@-2.5,-20 -2.01,-20.49 -2.01,-30.9
  IN_Layer 9 w0.254: BANK_35.46@-15.92,-55.06 -15.92,-44.92 -2.01,-31.01 -2.01,-30.9
AP21: BANK_35.14 U1.AP21 | length 76
  IN_Layer 6 w0.14: -2.01,-30.9 -2.01,-20.51 U1.AP21@-1.5,-20
  IN_Layer 6 w0.254: BANK_35.14@-56.56,-55.06 -51.25,-49.75 -20.25,-49.75 -2.01,-31.51 -2.01,-30.9
AP22: BANK_35.42 U1.AP22 | length 44
  IN_Layer 8 w0.14: U1.AP22@-0.5,-20 -0.01,-20.49 -0.01,-30.9
  IN_Layer 8 w0.254: BANK_35.42@-21,-55.06 -21,-52.75 -0.01,-31.76 -0.01,-30.9
AP24: BANK_15.35 U1.AP24 | length 80.8
  IN_Layer 8 w0.14: U1.AP24@1.5,-20 2,-20.5 2,-31.5
  IN_Layer 8 w0.254: 2,-31.5 2,-36.5 10.5,-45 47,-45 52.75,-50.75 52.75,-56.27 BANK_15.35@54.08,-57.6
AP25: BANK_15.37 U1.AP25 | length 82.9
  IN_Layer 8 w0.14: U1.AP25@2.5,-20 3,-20.5 3,-31.5
  IN_Layer 8 w0.254: 3,-31.5 3,-36.5 11,-44.5 50,-44.5 55.5,-50 55.5,-56.48 BANK_15.37@56.62,-57.6
AP26: BANK_15.40 U1.AP26 | length 77.9
  IN_Layer 6 w0.14: U1.AP26@3.5,-20 4.01,-20.51 4.01,-30.9
  IN_Layer 6 w0.254: 4.01,-30.9 4.01,-33.76 21.5,-51.25 55.35,-51.25 BANK_15.40@59.159,-55.059
AP27: BANK_14.8 U1.AP27 | length 55.4
  IN_Layer 9 w0.14: U1.AP27@4.5,-20 5,-20.5 22.3,-20.5
  IN_Layer 9 w0.254: 22.3,-20.5 31.75,-20.5 44.25,-8 50.86,-8 BANK_14.8@53.42,-10.56
AP29: BANK_14.26 U1.AP29 | length 76.4
  IN_Layer 8 w0.14: U1.AP29@6.5,-20 7.01,-19.49 22.3,-19.49
  IN_Layer 8 w0.254: 22.3,-19.49 28.26,-19.49 40.469,-7.281 73.001,-7.281 BANK_14.26@76.28,-10.56
AP30: BANK_14.40 U1.AP30 | length 92.8
  IN_Layer 7 w0.14: U1.AP30@7.5,-20 7.99,-19.51 22.3,-19.51
  IN_Layer 7 w0.254: 22.3,-19.51 24.885,-19.51 36.645,-7.75 91.25,-7.75 BANK_14.40@94.06,-10.56
AP31: BANK_16.14 U1.AP31 | length 55.5
  Bottom Layer w0.14: U1.AP31@8.5,-20 9.01,-20.51 22.3,-20.51
  Bottom Layer w0.254: 22.3,-20.51 54.49,-20.51 BANK_16.14@61.04,-27.06
AP32: BANK_16.30 U1.AP32 | length 74.8
  IN_Layer 6 w0.14: U1.AP32@9.5,-20 10.01,-20.51 22.3,-20.51
  IN_Layer 6 w0.254: 22.3,-20.51 74.81,-20.51 BANK_16.30@81.36,-27.06
AR12: BANK_36.12 U1.AR12 | length 86
  Top Layer 1 w0.14: -22.3,-21.51 -10.99,-21.51 -10.5,-21.02 U1.AR12@-10.5,-21
  Top Layer 1 w0.254: BANK_36.12@-94.03,-27.03 -88.51,-21.51 -22.3,-21.51
AR13: BANK_36.26 U1.AR13 | length 69.6
  IN_Layer 6 w0.14: -22.1,-20.5 -10,-20.5 U1.AR13@-9.5,-21
  IN_Layer 6 w0.254: BANK_36.26@-76.22,-27.06 -69.66,-20.5 -22.1,-20.5
AR14: BANK_36.36 U1.AR14 | length 58
  Bottom Layer w0.14: -22.1,-20.49 -9.01,-20.49 U1.AR14@-8.5,-21
  Bottom Layer w0.254: BANK_36.36@-63.52,-27.06 -56.95,-20.49 -22.1,-20.49
AR16: BANK_34.19 U1.AR16 | length 81.4
  IN_Layer 7 w0.14: -22.1,-20.826 -21.784,-20.51 -6.99,-20.51 U1.AR16@-6.5,-21
  IN_Layer 7 w0.254: BANK_34.19@-83.84,-13.1 -75.44,-21.5 -22.774,-21.5 -22.1,-20.826
AR17: BANK_34.20 U1.AR17 | length 85.4
  IN_Layer 8 w0.14: -22.1,-20.51 -18.941,-20.51 -5.99,-20.51 U1.AR17@-5.5,-21
  IN_Layer 8 w0.254: BANK_34.20@-83.84,-10.56 -82.75,-11.65 -82.75,-16.25 -80.128,-18.872 -23.741,-18.872 -22.247,-20.366 -22.103,-20.51 -22.1,-20.51
AR18: BANK_34.38 U1.AR18 | length 75.3
  IN_Layer 8 w0.14: -22.1,-11.49 -2.317,-11.49 -2.01,-11.797 -2.01,-20.26 -2.26,-20.51 -4.01,-20.51 U1.AR18@-4.5,-21
  IN_Layer 8 w0.254: BANK_34.38@-60.98,-10.56 -59.75,-11.79 -59.75,-14.25 -58.75,-15.25 -26,-15.25 -22.24,-11.49 -22.1,-11.49
AR19: BANK_35.34 U1.AR19 | length 46.9
  IN_Layer 8 w0.14: -7,-30.9 -6.943,-30.843 -5.196,-30.843 -4.99,-30.637 -4.99,-21.797 -4.683,-21.49 -3.99,-21.49 U1.AR19@-3.5,-21
  IN_Layer 8 w0.254: BANK_35.34@-31.16,-55.06 -7,-30.9
AR21: BANK_35.38 U1.AR21 | length 44.2
  IN_Layer 8 w0.14: -2.01,-30.9 -2.01,-21.51 U1.AR21@-1.5,-21
  IN_Layer 8 w0.254: BANK_35.38@-26.08,-55.06 -2.01,-30.99 -2.01,-30.9
AR22: BANK_35.40 U1.AR22 | length 43.6
  IN_Layer 8 w0.14: -1.25,-31.25 -0.99,-30.99 -0.99,-21.49 U1.AR22@-0.5,-21
  IN_Layer 8 w0.254: BANK_35.40@-23.54,-55.06 -23.54,-53.54 -1.25,-31.25
AR23: BANK_35.25 U1.AR23 | length 63.7
  IN_Layer 10 w0.14: -0.25,-31.25 0.01,-30.99 0.01,-21.49 U1.AR23@0.5,-21
  IN_Layer 10 w0.254: BANK_35.25@-41.32,-57.6 -40,-56.28 -40,-54.25 -28.599,-42.849 -11.849,-42.849 -0.25,-31.25
AR24: BANK_15.27 U1.AR24 | length 69.4
  IN_Layer 9 w0.14: U1.AR24@1.5,-21 2.01,-21.51 2.01,-30.9
  IN_Layer 9 w0.254: 2.01,-30.9 2.01,-31.26 5.75,-35 31.75,-35 42.75,-46 42.75,-56.43 BANK_15.27@43.92,-57.6
AR26: BANK_15.31 U1.AR26 | length 71.3
  IN_Layer 9 w0.14: U1.AR26@3.5,-21 4,-21.5 4,-30.9
  IN_Layer 9 w0.254: 4,-30.9 4,-31.25 6.25,-33.5 33.25,-33.5 47.75,-48 47.75,-56.337 49,-57.587 BANK_15.31@49,-57.6
AR27: BANK_14.6 U1.AR27 | length 52.6
  IN_Layer 9 w0.14: U1.AR27@4.5,-21 5,-21.5 22.3,-21.5
  IN_Layer 9 w0.254: 22.3,-21.5 31.75,-21.5 44.5,-8.75 49.07,-8.75 BANK_14.6@50.88,-10.56
AR28: BANK_14.24 U1.AR28 | length 75
  IN_Layer 8 w0.14: U1.AR28@5.5,-21 6.01,-20.49 22.3,-20.49
  IN_Layer 8 w0.254: 22.3,-20.49 28.01,-20.49 40.845,-7.655 70.835,-7.655 BANK_14.24@73.74,-10.56
AR29: BANK_14.38 U1.AR29 | length 91.3
  IN_Layer 7 w0.14: U1.AR29@6.5,-21 7,-20.5 22.3,-20.5
  IN_Layer 7 w0.254: 22.3,-20.5 24.423,-20.5 36.673,-8.25 89.21,-8.25 BANK_14.38@91.52,-10.56
AR31: BANK_16.12 U1.AR31 | length 52.5
  Bottom Layer w0.14: U1.AR31@8.5,-21 9.01,-21.51 22.3,-21.51
  Bottom Layer w0.254: 22.3,-21.51 52.95,-21.51 BANK_16.12@58.5,-27.06
AR32: BANK_16.28 U1.AR32 | length 71.8
  IN_Layer 6 w0.14: U1.AR32@9.5,-21 10.01,-21.51 22.3,-21.51
  IN_Layer 6 w0.254: 22.3,-21.51 73.27,-21.51 BANK_16.28@78.82,-27.06
AR33: BANK_16.42 U1.AR33 | length 89
  Top Layer 1 w0.14: U1.AR33@10.5,-21 10.99,-20.51 22.3,-20.51
  Top Layer 1 w0.254: 22.3,-20.51 90.05,-20.51 BANK_16.42@96.6,-27.06
AT13: BANK_36.28 U1.AT13 | length 66.7
  IN_Layer 6 w0.14: -22.1,-21.5 -10,-21.5 U1.AT13@-9.5,-22
  IN_Layer 6 w0.254: BANK_36.28@-73.68,-27.06 -68.12,-21.5 -22.1,-21.5
AT14: BANK_36.38 U1.AT14 | length 55
  Bottom Layer w0.14: -22.1,-21.49 -9.01,-21.49 U1.AT14@-8.5,-22
  Bottom Layer w0.254: BANK_36.38@-60.98,-27.06 -55.41,-21.49 -22.1,-21.49
AT15: BANK_34.17 U1.AT15 | length 83
  IN_Layer 7 w0.14: -22.1,-21.826 -21.784,-21.51 -7.99,-21.51 U1.AT15@-7.5,-22
  IN_Layer 7 w0.254: BANK_34.17@-86.38,-13.1 -77.48,-22 -22.274,-22 -22.1,-21.826
AT16: BANK_34.18 U1.AT16 | length 87.7
  IN_Layer 8 w0.14: -22.1,-21.5 -7,-21.5 U1.AT16@-6.5,-22
  IN_Layer 8 w0.254: BANK_34.18@-86.38,-10.56 -85.25,-11.69 -85.25,-17 -83.004,-19.246 -24.354,-19.246 -22.1,-21.5
AT18: BANK_34.40 U1.AT18 | length 64.3
  IN_Layer 9 w0.14: -22.1,-20.49 -4.317,-20.49 -4.01,-20.797 -4.01,-21.51 U1.AT18@-4.5,-22
  IN_Layer 9 w0.254: BANK_34.40@-58.44,-10.56 -53.38,-5.5 -42.25,-5.5 -27.26,-20.49 -22.1,-20.49
AT19: BANK_35.36 U1.AT19 | length 43.8
  IN_Layer 8 w0.14: -4.5,-31.5 -4.01,-31.01 -4.01,-22.51 U1.AT19@-3.5,-22
  IN_Layer 8 w0.254: BANK_35.36@-28.62,-55.06 -5.06,-31.5 -4.5,-31.5
AT20: BANK_35.1 U1.AT20 | length 97.1
  IN_Layer 10 w0.14: -22.1,-21.5 -3.022,-21.5 -2.522,-22 U1.AT20@-2.5,-22
  IN_Layer 10 w0.254: BANK_35.1@-71.8,-57.6 -73,-56.4 -73,-39 -67.75,-33.75 -36,-33.75 -23.75,-21.5 -22.1,-21.5
AT21: BANK_35.48 U1.AT21 | length 38.4
  IN_Layer 9 w0.14: U1.AT21@-1.5,-22 -1.01,-22.49 -1.01,-30.9
  IN_Layer 9 w0.254: BANK_35.48@-13.38,-55.06 -13.38,-43.38 -1.01,-31.01 -1.01,-30.9
AT23: BANK_15.25 U1.AT23 | length 67.5
  IN_Layer 9 w0.14: U1.AT23@0.5,-22 1.01,-22.51 1.01,-30.9
  IN_Layer 9 w0.254: 1.01,-30.9 1.01,-31.26 5.5,-35.75 30.971,-35.75 40.25,-45.029 40.25,-56.47 BANK_15.25@41.38,-57.6
AT24: BANK_15.30 U1.AT24 | length 70.8
  IN_Layer 10 w0.14: U1.AT24@1.5,-22 2,-21.5 2,-19.582 2.082,-19.5 22.3,-19.5
  IN_Layer 10 w0.254: 22.3,-19.5 26.25,-19.5 46.46,-39.71 BANK_15.30@46.46,-55.06
AT25: BANK_15.29 U1.AT25 | length 69.3
  IN_Layer 9 w0.14: U1.AT25@2.5,-22 3.01,-22.51 3.01,-30.9
  IN_Layer 9 w0.254: 3.01,-30.9 3.01,-31.26 6,-34.25 32.5,-34.25 45.308,-47.059 45.308,-56.448 BANK_15.29@46.46,-57.6
AT26: BANK_15.26 U1.AT26 | length 62.5
  IN_Layer 10 w0.14: U1.AT26@3.5,-22 3.99,-21.51 22.3,-21.51
  IN_Layer 10 w0.254: 22.3,-21.51 25.76,-21.51 41.38,-37.13 BANK_15.26@41.38,-55.06
AT28: BANK_14.4 U1.AT28 | length 48.8
  IN_Layer 9 w0.14: U1.AT28@5.5,-22 6,-22.5 22.3,-22.5
  IN_Layer 9 w0.254: 22.3,-22.5 32,-22.5 44.937,-9.563 47.343,-9.563 BANK_14.4@48.34,-10.56
AT29: BANK_14.22 U1.AT29 | length 71.5
  IN_Layer 8 w0.14: U1.AT29@6.5,-22 7.01,-21.49 22.3,-21.49
  IN_Layer 8 w0.254: 22.3,-21.49 27.76,-21.49 41.221,-8.029 68.669,-8.029 BANK_14.22@71.2,-10.56
AT30: BANK_14.31 U1.AT30 | length 81.3
  IN_Layer 7 w0.14: U1.AT30@7.5,-22 8.01,-21.49 8.297,-21.49 22.3,-21.49
  IN_Layer 7 w0.254: 22.3,-21.49 24.76,-21.49 28,-18.25 80.75,-18.25 83.9,-15.1 BANK_14.31@83.9,-13.1
AT31: BANK_16.10 U1.AT31 | length 49.6
  Bottom Layer w0.14: U1.AT31@8.5,-22 8.561,-22 9.051,-22.49 22.3,-22.49
  Bottom Layer w0.254: 22.3,-22.49 51.39,-22.49 BANK_16.10@55.96,-27.06
AT33: BANK_16.40 U1.AT33 | length 86.1
  Top Layer 1 w0.14: U1.AT33@10.5,-22 10.99,-21.51 22.3,-21.51
  Top Layer 1 w0.254: 22.3,-21.51 88.51,-21.51 BANK_16.40@94.06,-27.06
AU10: BANK_36.17 U1.AU10 | length 84.8
  Top Layer 1 w0.14: -19.005,-30.9 -19.005,-23.572 -18.923,-23.49 -12.99,-23.49 U1.AU10@-12.5,-23
  Top Layer 1 w0.254: BANK_36.17@-86.38,-29.6 -86.38,-31.38 -85.01,-32.75 -20.5,-32.75 -19.005,-31.255 -19.005,-30.9
AU11: BANK_36.19 U1.AU11 | length 83.5
  Top Layer 1 w0.14: -20.01,-30.75 -20.01,-22.817 -19.693,-22.5 -12,-22.5 U1.AU11@-11.5,-23
  Top Layer 1 w0.254: BANK_36.19@-83.84,-29.6 -83.84,-31.16 -82.75,-32.25 -21,-32.25 -20.01,-31.26 -20.01,-30.75
AU12: BANK_36.35 U1.AU12 | length 58.7
  IN_Layer 6 w0.14: -22.1,-23.49 -10.99,-23.49 U1.AU12@-10.5,-23
  IN_Layer 6 w0.254: BANK_36.35@-63.52,-29.6 -63.52,-31.23 -62.75,-32 -31.093,-32 -24.96,-25.867 -22.583,-23.49 -22.1,-23.49
AU13: BANK_36.30 U1.AU13 | length 63.7
  IN_Layer 6 w0.14: -22.1,-22.5 -10,-22.5 U1.AU13@-9.5,-23
  IN_Layer 6 w0.254: BANK_36.30@-71.14,-27.06 -66.58,-22.5 -22.1,-22.5
AU15: BANK_34.15 EX_clk.1 U1.AU15 | length 135.6
  Top Layer 1 w0.14: -9.01,-30.9 -9.01,-23.817 -8.703,-23.51 -8.297,-23.51 -8.292,-23.515 -8.015,-23.515 U1.AU15@-7.5,-23
  Top Layer 1 w0.254: EX_clk.1@-45,-43 -35.005,-43 -29.28,-37.275 -15.191,-37.275 -9.01,-31.094 -9.01,-30.9
  IN_Layer 7 w0.14: -22.1,-22.49 -8.01,-22.49 U1.AU15@-7.5,-23
  IN_Layer 7 w0.254: BANK_34.15@-88.92,-13.1 -79.53,-22.49 -22.1,-22.49
AU16: BANK_34.16 U1.AU16 | length 91.2
  IN_Layer 8 w0.14: -22.1,-22.49 -7.01,-22.49 U1.AU16@-6.5,-23
  IN_Layer 8 w0.254: BANK_34.16@-88.92,-10.56 -87.5,-11.98 -87.5,-18.25 -86.13,-19.62 -24.97,-19.62 -22.1,-22.49
AU17: BANK_34.44 U1.AU17 | length 56
  IN_Layer 9 w0.14: -22.1,-22.49 -6.01,-22.49 U1.AU17@-5.5,-23
  IN_Layer 9 w0.254: BANK_34.44@-53.36,-10.56 -49.8,-7 -43.25,-7 -27.76,-22.49 -22.1,-22.49
AU18: BANK_34.42 U1.AU18 | length 60.5
  IN_Layer 9 w0.14: -22.1,-21.49 -5.297,-21.49 -4.99,-21.797 -4.99,-22.51 U1.AU18@-4.5,-23
  IN_Layer 9 w0.254: BANK_34.42@-55.9,-10.56 -51.59,-6.25 -42.75,-6.25 -27.51,-21.49 -22.1,-21.49
AU20: BANK_35.3 U1.AU20 | length 91.5
  IN_Layer 10 w0.14: -22.1,-22.5 -3,-22.5 U1.AU20@-2.5,-23
  IN_Layer 10 w0.254: BANK_35.3@-69.26,-57.6 -68.25,-56.59 -68.25,-39.5 -63.25,-34.5 -35.75,-34.5 -23.75,-22.5 -22.1,-22.5
AU21: BANK_35.5 U1.AU21 | length 89.4
  IN_Layer 10 w0.14: -22.1,-23.5 -2,-23.5 U1.AU21@-1.5,-23
  IN_Layer 10 w0.254: BANK_35.5@-66.72,-57.6 -65.723,-56.603 -65.723,-39.723 -61.5,-35.5 -35.5,-35.5 -23.5,-23.5 -22.1,-23.5
AU22: BANK_35.32 U1.AU22 | length 52
  IN_Layer 7 w0.14: U1.AU22@-0.5,-23 -0.5,-23.083 0,-23.583 0,-30.9
  IN_Layer 7 w0.254: BANK_35.32@-33.7,-55.06 -23.82,-45.18 -13.93,-45.18 0,-31.25 0,-30.9
AU23: BANK_15.32 U1.AU23 | length 76.1
  IN_Layer 10 w0.14: U1.AU23@0.5,-23 0.99,-22.51 0.99,-18.582 1.072,-18.5 22.3,-18.5
  IN_Layer 10 w0.254: 22.3,-18.5 26.539,-18.5 49,-40.961 BANK_15.32@49,-55.06
AU25: BANK_15.28 U1.AU25 | length 67.5
  IN_Layer 10 w0.14: U1.AU25@2.5,-23 2.99,-22.51 2.99,-20.817 3.297,-20.51 22.3,-20.51
  IN_Layer 10 w0.254: 22.3,-20.51 25.929,-20.51 43.92,-38.501 BANK_15.28@43.92,-55.06